# Altium PCB EDR.PcbDoc (part 2 of 2)
Units mm, origin at the board's own origin, x right, y up, seen from the top; angles counter-clockwise.
Board outline 99.5 x 72 mm, 2 copper layers (Top Layer, Bottom Layer); 162 components, 102 nets, 587 pads, 403 vias.
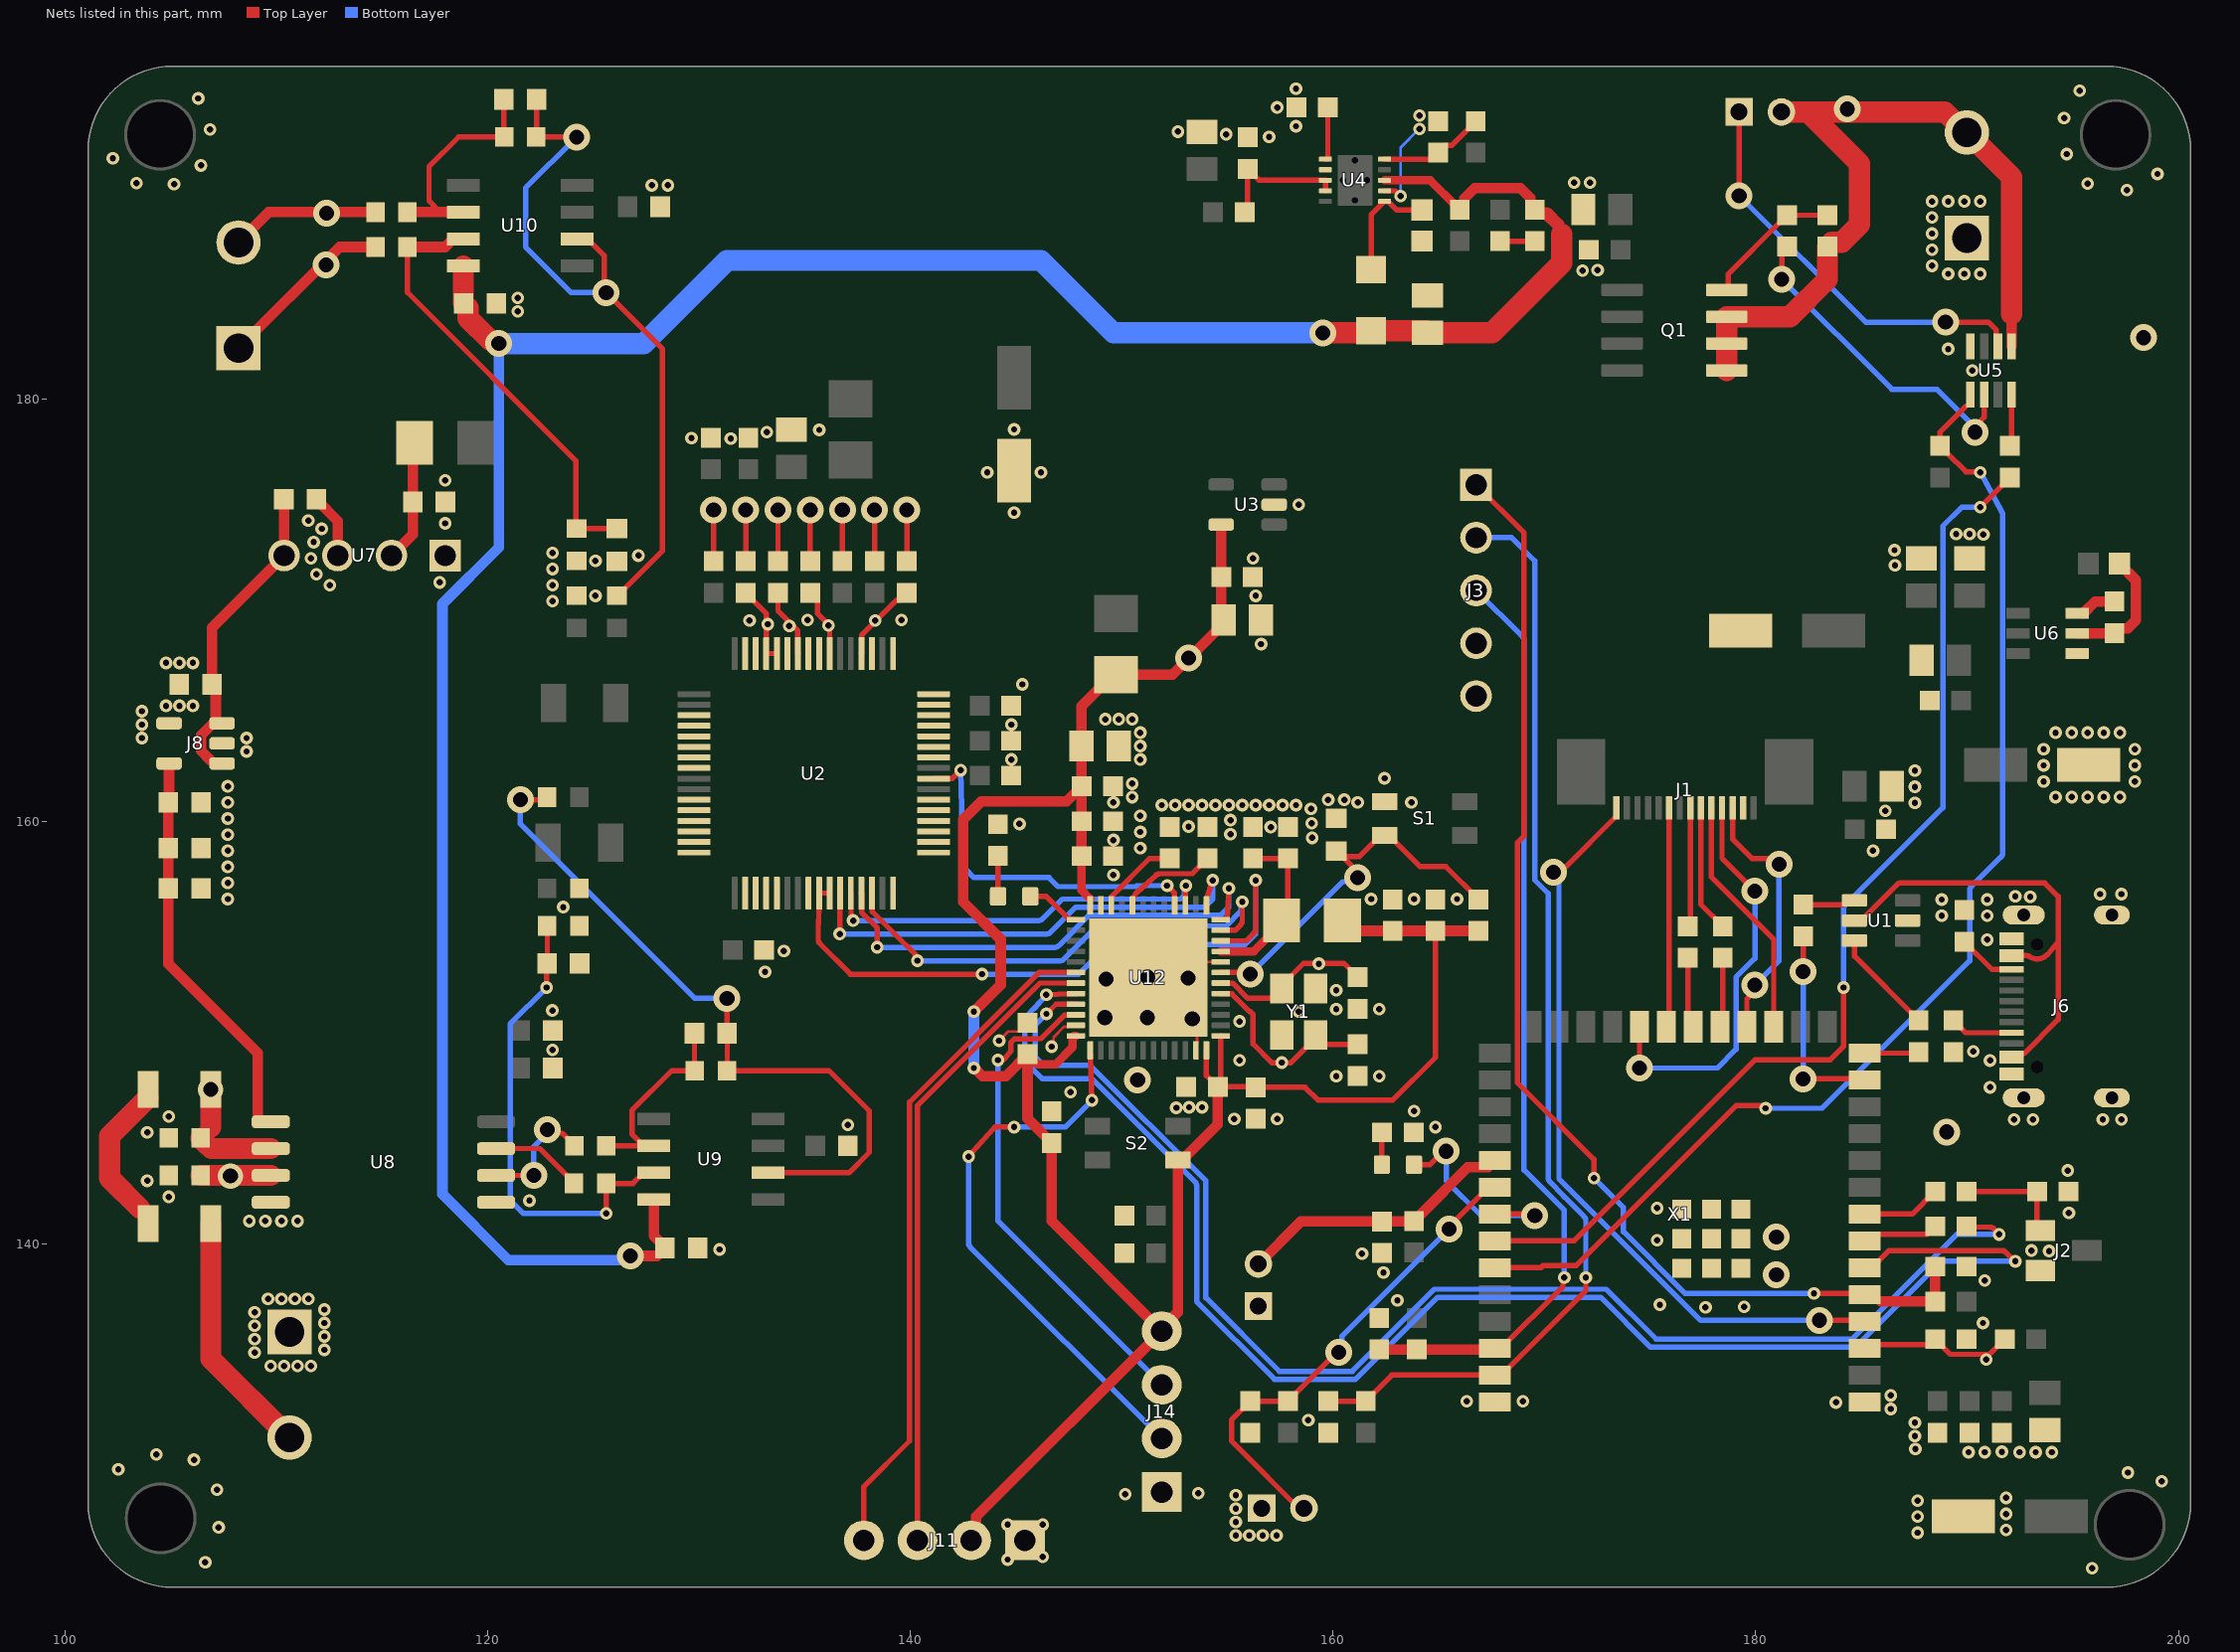
[diagram p2: the nets of this part, all layers, seen from the top]

## Via types
v1: diameter 0.6, hole 0.3, Top Layer to Bottom Layer, 331 vias
v2: diameter 1.27, hole 0.711, Top Layer to Bottom Layer, 70 vias
v3: diameter 1.2, hole 0.711, Top Layer to Bottom Layer, 2 vias

## Nets (pads, with @x,y where several pads share a name; then routed paths per layer and width w, separated by ;. In a path a pad name is that pad's centre, name@x,y a point inside that pad or via, vN(x,y) a via of type N, cw(c..) or ccw(c..) an arc to the next point about the centre after c; other vN are vias at no path point) (continued)
GND: C1.2 C2.1 C3.2 C4.2 C5.2 C6.1 C7.1 C8.1 C9.1 C10.2 C11.2 C12.2 C13.1 C14.1 C15.2 C16.2 C17.2 C18.2 C19.2 C20.1 C21.1 C22.1 C23.1 C24.1 C25.1 C26.1 C27.1 C28.2 C29.2 C30.2 C31.2 C32.2 C33.2 C34.1 C35.1 C36.1 C37.1 C38.2 C39.1 C40.1 C41.1 C42.1 C43.1 C44.1 C45.1 C46.1 C47.1 C48.1 C49.2 C50.2 C52.2 C53.1 C54.1 C55.2 C56.2 C57.1 C58.1 C60.2 C61.1 C62.1 C66.2 C70.2 C72.2 C73.2 C74.2 C75.2 C76.2 C79.1 C80.1 J1.2 J2.2 J3.4 J3.5 J4.1 J5.1 J6.A1_B12 J6.B1_A12 J6.S1 J6.S2 J6.S3 J6.S4 J11.1 J14.1 J15.1 L4.2 R6.1 R13.2 R14.1 R17.2 R18.2 R19.1 R38.1 R39.1 R40.1 R41.1 R44.1 S1.1 U1.2 U2.2 U2.3 U2.4 U2.5 U2.8 U2.16 U2.17 U2.18 U2.19 U2.20 U2.21 U2.22 U2.26 U2.27 U2.28 U2.29 U2.30 U2.31 U2.32 U2.33 U2.35 U2.40 U2.41 U2.43 U2.46 U2.47 U2.51 U2.52 U2.53 U2.54 U2.55 U2.56 U2.59 U2.60 U2.61 U2.62 U2.63 U2.64 U3.2 U4.2 U4.7 U5.4 U6.4 U7.1 U8.5 U12.8 U12.23 U12.35 U12.47 U12.49 X1.1 X1.40 X1.41 X1.42 X1.43 X1.44 X1.45 X1.46 X1.47 X1.48 X1.49 Y1.2 Y1.4 | length 33.5
  Top Layer w0.127: v1(144.196,149.631) 144.636,150.071 145.14,150.071 145.542,150.473 C15.2@145.542,150.478 ; v1(146.685,149.352) 146.776,149.443 146.776,149.802 147.262,150.289 147.455,150.289 147.526,150.36 U12.35@147.826,150.36 ; U12.47@153.506,149.18 153.566,149.551 153.566,149.874 v2(153.34,150.673) v2(151.232,152.629) v2(153.137,152.603) 153.992,153.36 U12.8@154.686,153.36
  Top Layer w0.254: R40.1@124.186,172.333 R40.1@124.206,172.353 ; C31.2@130.683,172.322 v2(130.683,174.752) ; C34.1@132.207,172.322 v2(132.207,174.752) ; C35.1@133.731,172.322 v2(133.731,174.752) ; C37.1@135.255,172.322 v2(135.255,174.752) ; C29.2@136.779,172.322 v2(136.779,174.752) ; C30.2@138.303,172.322 v2(138.303,174.752) ; C36.1@139.827,172.322 v2(139.827,174.752) ; U4.7@162.433,189.857 162.949,189.857 v1(163.195,189.611) ; U5.4@190.16,182.499 U5.4@190.16,182.905
  Bottom Layer w0.127: v1(163.195,189.611) 163.195,191.897 v1(164.084,192.786)
  other v1: 195.91,124.666 144.602,125.073 146.253,125.2 155.397,126.216 156.032,126.216 156.667,126.216 157.328,126.213 187.655,126.343 191.846,126.47 144.602,126.724 146.253,126.724 155.397,126.851 187.655,127.105 191.846,127.232 155.397,127.486 187.655,127.867 191.846,127.994 155.397,128.121 150.165,128.168 153.619,128.219 199.212,128.781 197.612,129.188 190.068,130.153 190.83,130.153 192.481,130.153 193.243,130.153 194.005,130.153 191.643,130.175 187.554,130.302 187.528,130.915 187.528,131.55 158.826,131.677 186.385,132.202 183.794,132.512 166.319,132.566 168.986,132.566 186.385,132.842 190.754,136.271 177.622,137.011 179.451,137.033 175.463,137.138 163.043,137.338 190.83,138.281 162.382,138.662 161.366,139.551 193.878,139.678 193.04,139.7 130.962,139.754 175.336,140.186 194.818,141.478 175.336,141.71 121.971,142.062 194.767,143.488 164.846,145.542 137.033,145.644 192.227,145.901 193.116,145.901 196.418,145.901 197.307,145.901 155.321,145.923 157.353,145.923 163.83,146.304 152.578,146.456 153.187,146.482 153.797,146.482 147.574,147.193 191.084,147.425 160.147,147.955 162.179,147.955 155.568,148.701 191.084,148.695 190.296,149.127 123.063,149.2 155.575,150.546 158.369,151.003 123.057,151.063 160.147,151.13 162.179,151.13 160.147,152.019 133.121,152.886 134.01,153.876 190.957,154.41 188.798,155.553 190.957,155.553 123.571,155.956 188.798,156.315 190.957,156.315 161.798,156.337 163.83,156.337 165.862,156.337 192.989,156.442 192.278,156.464 196.291,156.569 197.307,156.569 149.606,157.48 185.547,158.623 150.876,158.75 149.606,159.131 159.004,159.233 155.143,159.41 150.876,159.512 157.048,159.741 153.162,159.766 145.161,159.893 158.979,159.918 155.143,160.071 150.876,160.274 186.131,160.506 158.953,160.604 151.892,160.782 152.527,160.782 153.162,160.782 153.797,160.782 154.432,160.782 155.067,160.782 155.702,160.782 156.337,160.782 156.972,160.782 157.607,160.782 158.242,160.782 187.528,160.887 149.606,160.909 161.163,160.909 163.703,160.909 159.766,161.036 160.528,161.036 150.495,161.163 194.183,161.163 194.945,161.163 195.707,161.163 196.469,161.163 197.231,161.163 187.528,161.649 150.495,161.798 193.624,161.903 197.942,161.903 162.433,162.052 187.528,162.411 193.624,162.665 197.942,162.665 144.78,162.941 150.876,162.941 193.624,163.427 197.942,163.427 150.876,163.576 150.876,164.211 194.183,164.211 194.945,164.211 195.707,164.211 196.469,164.211 197.231,164.211 144.78,164.592 149.225,164.846 149.86,164.846 150.495,164.846 145.288,166.497 156.591,168.402 132.387,169.519 135.128,169.545 139.573,169.545 123.063,170.434 125.095,170.688 156.337,170.688 123.063,171.196 117.729,171.323 123.063,171.958 186.588,172.136 125.095,172.339 156.21,172.466 127.127,172.593 123.063,172.72 186.563,172.847 190.77,173.587 189.484,173.609 190.119,173.609 117.983,174.117 144.907,174.625 158.369,175.006 117.983,176.149 143.637,176.53 146.177,176.53 131.495,178.133 129.641,178.159 133.197,178.438 135.686,178.54 144.907,178.562 190.246,181.356 189.103,182.372 121.412,184.15 121.412,184.785 189.103,185.928 189.865,185.928 190.627,185.928 171.806,186.08 172.517,186.106 188.341,186.309 188.341,187.071 188.341,187.833 188.341,188.595 188.341,189.357 189.103,189.357 189.865,189.357 190.627,189.357 197.561,189.894 127.762,190.119 128.524,190.119 105.156,190.173 195.707,190.198 103.378,190.224 171.399,190.246 172.161,190.246 199.009,190.656 106.426,191.059 102.26,191.392 194.716,191.595 156.972,192.405 154.94,192.532 152.654,192.659 106.857,192.764 158.242,192.913 194.589,193.297 164.084,193.421 157.353,193.802 106.299,194.234 195.326,194.593 158.242,194.691
  other v2: 180.975,138.557 180.975,140.335 189.027,145.313 150.749,147.777 149.2,150.724 151.206,150.724 149.25,152.552 198.349,182.905
GPIO1: C11.1 J3.2 R8.1 X1.39 | length 53.1
  Top Layer w0.254: C11.1@159.766,132.571 R8.1@161.544,132.571 161.544,132.576 161.882,132.914 161.887,132.914 162.778,133.805 X1.39@167.653,133.805 167.953,133.805 171.958,137.81 v1(171.958,138.425)
  Bottom Layer w0.254: J3.2@166.768,173.442 168.442,173.442 169.545,172.339 169.545,157.239 170.18,156.604 170.18,143.141 ccw(c170.434,143.142) 170.249,142.968 170.915,142.268 ccw(c172.3,143.588) 170.942,142.24 171.883,141.299 cw(c171.704,141.119) 171.958,141.119 v1(171.958,138.425)
GPIO2: C12.1 J3.3 R9.1 X1.38 | length 44.6
  Top Layer w0.254: X1.38@167.596,135.018 167.896,135.018 170.876,137.998 170.876,138.359 v1(170.942,138.425)
  Top Layer w0.5: C12.1@162.179,135.018 R9.1@163.957,135.018 X1.38@167.596,135.018
  Bottom Layer w0.254: J3.3@166.768,170.942 168.963,168.747 cw(c168.783,168.568) 169.037,168.568 169.037,143.51 170.942,141.605 v1(170.942,138.425)
GPIO5: C10.1 J3.1 R7.1 X1.5 | length 56.3
  Top Layer w0.254: J3.1@166.768,175.942 169.037,173.673 169.037,159.321 168.714,158.998 168.714,147.643 172.339,144.018 v1(172.339,143.129) ; v1(182.753,137.668) 185.1,137.668 X1.5@185.153,137.615 185.476,137.292 185.92,137.292 185.925,137.287
  Top Layer w0.5: 185.925,137.287 R7.1@188.485,137.287 C10.1@188.485,138.938
  Bottom Layer w0.254: v1(172.339,143.129) 173.736,141.732 173.736,140.589 176.657,137.668 v1(182.753,137.668)
GPIO19: R15.1 X1.13 | length 9.7
  Top Layer w0.254: v2(182.245,147.828) 185.1,147.828 X1.13@185.153,147.775 ; v2(182.245,152.908) R15.1@182.245,154.576
  Bottom Layer w0.254: v2(182.245,147.828) v2(182.245,152.908)
GPIO20: R12.1 X1.14 | length 2.2
  Top Layer w0.254: X1.14@185.153,149.045 R12.1@187.395,149.045
GPIO38: C14.2 J5.2 R11.2 X1.31 | length 13.2
  Top Layer w0.254: R11.2@163.813,141.08 R11.2@163.83,141.097 163.83,141.102 164.168,141.44 R11.2@164.173,141.44 ; X1.31@167.33,143.642 X1.31@167.653,143.965
  Top Layer w0.5: J5.2@156.464,139.065 158.479,141.08 C14.2@162.306,141.08 R11.2@163.813,141.08 ; R11.2@164.173,141.44 166.375,143.642 X1.31@167.33,143.642
GPIO39: C13.2 J4.2 R10.2 X1.32 | length 23.2
  Top Layer w0.254: J4.2@158.623,127.508 158.369,127.508 155.52,130.357 155.513,130.357 155.364,130.506 155.364,130.513 155.194,130.683 155.194,131.677 156.083,132.566 C13.2@156.083,132.571 R10.2@157.861,132.571 157.861,132.576 158.199,132.914 158.204,132.914 160.164,134.874 v2(160.274,134.874) ; v2(165.481,140.716) 165.481,140.823 167.353,142.695 X1.32@167.653,142.695
  Bottom Layer w0.254: v2(160.274,134.874) 160.421,135.021 160.421,135.656 v2(165.481,140.716)
GPIO41: R24.2 X1.34 | length 51
  Top Layer w0.254: X1.34@167.653,140.155 171.397,140.155 179.959,148.717 183.514,148.717 184.149,149.352 v1(184.15,152.146) v1(184.15,152.146) ; v1(190.627,174.879) 190.627,174.891 192.024,176.288 R24.2@192.024,176.293
  Bottom Layer w0.254: v1(184.15,152.146) 184.15,155.956 188.849,160.655 188.849,173.99 189.738,174.879 v1(190.627,174.879)
GPIO42: R26.2 U5.5 X1.35 | length 58.1
  Top Layer w0.127: 189.945,179.667 190.02,179.667 190.16,179.807 U5.5@190.16,180.213
  Top Layer w0.254: X1.35@167.653,138.885 169.837,138.885 169.931,138.979 171.491,138.979 179.07,146.558 180.34,146.558 v1(180.467,146.431) ; 189.945,179.667 188.722,178.443 R26.2@188.722,177.783 188.722,177.778 189.06,177.44 189.065,177.44 189.946,176.559 190.598,176.559 v1(190.627,176.53)
  Bottom Layer w0.254: v1(180.467,146.431) 183.134,146.431 190.119,153.416 190.119,156.74 cw(c190.373,156.74) 190.193,156.919 191.602,158.328 ccw(c191.422,158.507) 191.676,158.507 191.676,174.54 ccw(c191.422,174.54) 191.645,174.662 v1(190.627,176.53)
ISO_GND: C63.1 C64.2 C65.1 C69.1 C71.1 J8.2 J8.4 J10.1 R32.1 R37.2 U7.3 U8.4 | length 3.1
  Top Layer w0.254: C64.2@111.9,175.23 C64.2@111.9,175.26
  Top Layer w0.5: C64.2@111.9,175.23 112.903,174.227 U7.3@112.903,172.593
  other v1: 106.629,124.946 107.264,126.597 107.188,128.375 102.514,129.34 106.095,129.797 104.317,130.051 109.728,134.239 110.363,134.239 110.998,134.239 111.633,134.239 108.966,134.874 112.268,135.001 108.966,135.509 112.268,135.636 108.966,136.144 112.268,136.271 108.966,136.779 112.268,136.906 109.601,137.414 110.236,137.414 110.871,137.414 111.506,137.414 108.712,141.097 109.474,141.097 110.236,141.097 110.998,141.097 104.902,142.24 103.886,143.002 103.886,145.288 104.902,146.05 107.696,156.337 107.696,157.099 107.696,157.861 107.696,158.623 107.696,159.385 107.696,160.147 107.696,160.909 107.696,161.671 108.585,163.322 103.632,163.957 108.585,163.957 103.632,164.592 103.632,165.227 104.775,165.481 105.41,165.481 106.045,165.481 104.775,167.513 105.41,167.513 106.045,167.513 112.522,171.196 111.887,171.704 111.633,172.466 111.76,173.228 112.141,173.863 111.506,174.244
LCD-CS: J1.3 X1.18 | length 12.5
  Top Layer w0.254: J1.3@178.903,160.655 178.903,159.171 179.812,158.262 180.553,158.262 180.827,157.988 v2(181.102,157.988) ; X1.18@179.578,150.295 179.578,151.617 179.959,151.998 v2(179.959,152.273)
  Bottom Layer w0.254: v2(179.959,152.273) 181.102,153.416 v2(181.102,157.988)
LCD-RS: J1.5 X1.17 | length 11.6
  Top Layer w0.254: J1.5@177.903,160.655 177.903,157.377 180.848,154.432 X1.17@180.848,150.295
LCD-RST: J1.4 X1.22 | length 19.3
  Top Layer w0.254: v2(174.498,148.336) X1.22@174.498,150.295 ; J1.4@178.403,160.655 178.403,158.274 v2(179.959,156.718)
  Bottom Layer w0.254: v2(174.498,148.336) 178.181,148.336 179.07,149.225 179.07,152.641 179.959,153.53 v2(179.959,156.718)
MISD: J1.9 X1.21 | length 10.4
  Top Layer w0.254: X1.21@175.768,150.295 175.903,150.43 J1.9@175.903,160.655
MOSI: J1.6 R3.1 | length 6
  Top Layer w0.254: J1.6@177.403,160.655 177.403,156.087 178.435,155.055 R3.1@178.435,155.05
NetC4_1: C4.1 R1.1 X1.3 | length 7.4
  Top Layer w0.254: X1.3@185.153,135.075 185.333,135.255 186.969,135.255 188.231,135.255 C4.1@188.485,135.509 188.49,135.509 189.209,134.79 191.063,134.79 191.782,135.509 R1.1@191.787,135.509
  other v1: 190.906,134.544
NetC19_1: C19.1 U12.22 | length 3.9
  Top Layer w0.254: U12.22@149.506,156.04 149.514,156.048 149.514,156.457 151.316,158.259 C19.1@152.273,158.259
NetC20_2: C20.2 C21.2 E2.1 U12.9 | length 8.3
  Top Layer w0.254: C20.2@156.21,158.259 C21.2@157.861,158.259 157.861,155.623 E2.1@157.559,155.321 E2.1@157.559,155.171
  Top Layer w0.4: U12.9@154.686,153.86 156.248,153.86 E2.1@157.559,155.171
NetC24_2: C24.2 R16.1 S1.3 U12.7 | length 17.8
  Top Layer w0.254: U12.7@154.686,152.86 155.623,152.86 v2@155.702,152.781 ; C24.2@160.147,158.61 160.177,158.61 C24.2@160.431,158.356 ; v2(161.163,157.353) 161.163,157.624 C24.2@160.431,158.356 ; R16.1@166.878,156.32 166.878,156.325 165.334,157.868 164.117,157.868 162.638,159.347 S1.3@162.438,159.347 162.238,159.347 161.247,158.356 C24.2@160.431,158.356
  Bottom Layer w0.254: v2(156.083,152.781) 160.461,157.159 160.969,157.159 v2(161.163,157.353)
NetC25_2: C25.2 U12.5 Y1.1 | length 9.4
  Top Layer w0.254: U12.5@154.686,151.86 154.694,151.852 155.216,151.852 156.065,151.003 156.083,151.003 156.21,150.876 156.21,149.479 157.099,148.59 158.006,148.59 159.169,149.753 159.169,149.885 159.592,149.462 C25.2@161.163,149.462
  other v1: 157.574,148.599
NetC27_2: C27.2 U12.6 Y1.3 | length 7.8
  Top Layer w0.254: U12.6@154.686,152.36 154.694,152.352 155.255,152.352 155.969,151.638 157.146,151.638 157.569,152.061 Y1.3@157.569,152.103 157.569,152.253 158.605,153.289 160.516,153.289 161.163,152.642 C27.2@161.163,152.637
  other v1: 159.327,153.273
NetC34_2: C34.2 U2.44 U2.45 | length 3.8
  Top Layer w0.254: C34.2@132.207,170.832 132.207,170.827 133.177,169.857 U2.45@133.177,167.956 U2.44@133.677,167.956
  other v1: 133.251,169.342
NetC35_2: C35.2 U2.42 | length 3.3
  Top Layer w0.254: C35.2@133.731,170.832 133.731,169.981 134.664,169.048 134.664,167.969 U2.42@134.677,167.956
  other v1: 134.267,169.265
NetC36_2: C36.2 U2.36 | length 3.8
  Top Layer w0.254: U2.36@137.677,167.956 137.69,167.969 137.69,168.821 139.358,170.489 139.489,170.489 C36.2@139.827,170.827
  other v1: 138.331,169.519
NetC37_2: C37.2 U2.39 | length 3.3
  Top Layer w0.254: C37.2@135.255,170.832 135.593,170.494 135.593,169.863 136.177,169.279 U2.39@136.177,167.956
  other v1: 136.121,169.291
NetC51_2: C51.2 R21.1 | length 1.8
  Top Layer w0.254: C51.2@167.767,187.469 R21.1@169.545,187.469
NetC52_1: C52.1 U4.1 | length 2.6
  Top Layer w0.254: U4.1@159.633,191.357 159.742,191.357 159.749,191.364 C52.1@159.749,193.802
NetC53_2: C53.2 R22.1 U4.10 | length 5.1
  Top Layer w0.254: U4.10@162.433,191.357 164.67,191.357 C53.2@164.973,191.66 164.973,191.665 165.311,192.003 165.609,192.003 166.751,193.145 R22.1@166.751,193.15
NetC59_2: C59.2 U6.6 | length 2
  Top Layer w0.254: U6.6@195.205,169.86 U6.6@195.504,169.86
  Top Layer w0.5: U6.6@195.504,169.86 196.061,170.417 C59.2@196.977,170.417
NetC66_1: C66.1 E1.2 U7.2 | length 5.8
  Top Layer w0.254: E1.2@116.446,177.835 E1.2@116.538,177.927
  Top Layer w0.5: U7.2@115.443,172.593 116.446,173.596 C66.1@116.446,175.133 E1.2@116.446,177.835
NetC67_1: C67.1 R28.1 R31.2 U10.2 | length 10.5
  Top Layer w0.254: 117.747,188.849 117.221,189.375 117.221,191.008 118.618,192.405 R28.1@120.784,192.405 120.764,192.425 C67.1@120.764,194.183
  Top Layer w0.5: 116.655,188.849 117.747,188.849 U10.2@118.839,188.849
NetC67_2: C67.2 R28.2 R36.1 U10.6 | length 42.2
  Top Layer w0.254: C67.2@122.314,194.183 122.314,192.425 R28.2@122.294,192.405 v2(124.206,192.405) ; U10.6@124.239,187.579 124.714,187.579 125.514,186.779 v2@125.514,185.128 ; R36.1@126.111,170.688 126.141,170.688 128.27,172.817 128.27,182.372 ; v2@125.514,185.128 128.27,182.372 ; v2@125.514,185.128 128.27,182.372 ; v2@125.514,185.128 128.27,182.372
  Bottom Layer w0.254: v2(124.206,192.405) 121.793,189.992 121.793,187.198 123.952,185.039 v2(125.603,185.039)
NetC68_1: C68.1 R29.1 R30.2 U9.2 | length 9.7
  Top Layer w0.254: R30.2@125.603,144.653 U9.2@127.381,144.653 ; U9.2@127.856,144.653 U9.2@127.381,144.653 ; C68.1@129.781,149.987 129.781,148.229 R29.1@129.801,148.209 128.708,148.209 126.827,146.328 126.827,145.207 U9.2@127.381,144.653
NetC68_2: C68.2 R29.2 R33.1 U9.6 | length 33.8
  Top Layer w0.254: v2(121.539,161.036) 122.689,161.036 R33.1@122.816,161.163 ; v2(131.318,151.638) 131.318,150 C68.2@131.331,149.987 131.331,148.229 R29.2@131.311,148.209 136.144,148.209 138.049,146.304 138.049,144.347 137.085,143.383 U9.6@133.256,143.383
  Bottom Layer w0.254: v2(121.539,161.036) 121.539,159.893 129.794,151.638 v2(131.318,151.638)
NetC79_2: C79.2 R34.2 R39.2 U9.3 | length 22.4
  Top Layer w0.127: C79.2@122.783,153.276 C79.2@122.796,153.289 ; R34.2@125.596,142.875 R34.2@125.603,142.868
  Top Layer w0.24: v1(122.783,152.149) C79.2@122.783,153.276
  Top Layer w0.254: C79.2@122.796,153.289 122.816,153.309 R39.2@122.816,155.067 ; R34.2@125.596,142.875 126.873,142.875 127.381,143.383 U9.3@127.856,143.383 ; v1(125.603,141.456) R34.2@125.603,142.868
  Bottom Layer w0.254: v1(122.783,152.149) 121.056,150.422 121.056,142.083 121.683,141.456 v1(125.603,141.456)
NetC80_2: C80.2 R35.2 R40.2 U10.3 | length 25.3
  Top Layer w0.254: R35.2@116.198,187.198 116.198,185.046 124.163,177.081 R40.2@124.163,173.876 ; U10.3@118.364,187.579 U10.3@118.839,187.579 ; R40.2@124.163,173.876 C80.2@126.111,173.876 ; R40.2@124.163,173.876 C80.2@126.111,173.876 ; R40.2@124.163,173.876 C80.2@126.111,173.876
  Top Layer w0.5: R35.2@116.198,187.198 117.983,187.198 U10.3@118.364,187.579
NetD1_C: D1.C L4.1 U4.6 | length 5.4
  Top Layer w0.254: D1.C@161.798,186.131 161.798,188.722 U4.6@162.433,189.357 162.599,189.357 163.007,188.949 L4.1@164.211,188.949
NetD2_NEG: D2.NEG R44.2 | length 1.5
  Top Layer w0.254: D2.NEG@162.306,143.764 162.306,145.271 R44.2@162.323,145.288
NetD2_POS: D2.POS X1.33 | length 11.5
  Top Layer w0.254: D2.POS@163.83,143.764 164.592,143.764 ; X1.33@167.653,141.425 169.09,141.425 v2@169.164,141.351 ; 164.592,143.764 v2@165.29,144.463 ; 164.592,143.764 v2@165.29,144.463 ; 164.592,143.764 v2@165.29,144.463
  Bottom Layer w0.254: v2(165.354,144.399) 165.354,143.002 167.005,141.351 v2(169.545,141.351)
NetD_NEG: D.NEG R18.1 | length 1.9
  Top Layer w0.254: D.NEG@144.145,156.464 R18.1@144.145,158.386
NetD_POS: D.POS U12.25 | length 2.6
  Top Layer w0.254: D.POS@145.669,156.464 146.431,156.464 147.518,155.377 147.518,155.368 147.526,155.36 U12.25@147.826,155.36
NetJ2_1: J2.1 R5.1 R6.2 | length 5.2
  Top Layer w0.254: R5.1@189.975,142.494 R6.2@193.311,142.494 193.311,140.803 J2.1@193.464,140.65
NetJ6_A5: J6.A5 R13.1 | length 3
  Top Layer w0.254: R13.1@189.357,150.588 189.357,150.583 189.695,150.245 189.7,150.245 189.938,150.007 J6.A5@192.1,150.007
NetJ6_B5: J6.B5 R14.2 | length 2.8
  Top Layer w0.254: R14.2@189.865,154.322 189.865,154.317 191.175,153.007 J6.B5@192.1,153.007
NetJ9_1: J9.1 R35.1 | length 9
  Top Layer w0.254: R35.1@114.35,186.86 114.38,186.86 114.688,187.168 R35.1@114.688,187.198
  Top Layer w0.5: J9.1@108.204,182.412 112.99,187.198 R35.1@114.688,187.198
  other v2: 112.344,186.36
NetJ9_2: J9.2 R31.1 | length 7.6
  Top Layer w0.254: J9.2@108.204,187.412 J9.2@108.555,187.061 ; R31.1@114.688,188.849 R31.1@114.688,188.879
  Top Layer w0.5: J9.2@108.204,187.412 109.641,188.849 R31.1@114.688,188.849
  other v2: 112.37,188.798
NetJ10_2: J10.2 R43.1 | length 11.7
  Top Layer w1: R43.1@106.89,140.97 106.89,134.577 J10.2@110.617,130.85
NetJ11_3: J11.3 U12.31 | length 30.5
  Top Layer w0.254: J11.3@140.335,125.984 140.335,146.565 146.13,152.36 U12.31@147.826,152.36
NetJ11_4: J11.4 U12.30 | length 32
  Top Layer w0.254: J11.4@137.795,125.984 137.795,128.524 139.954,130.683 139.954,146.723 146.091,152.86 U12.30@147.826,152.86
NetJ16_1: J16.1 U5.2 | length 19.6
  Top Layer w0.254: v2@179.197,189.611 v2(179.213,189.627) J16.1@179.213,193.59 ; v2(188.976,183.642) 191.008,183.642 191.384,183.266 191.384,182.575 U5.2@191.46,182.499
  Bottom Layer w0.254: v2(179.213,189.627) 185.198,183.642 v2(188.976,183.642)
NetQ1_4: Q1.4 R25.2 R27.1 | length 6.6
  Top Layer w0.254: Q1.4@178.624,185.166 178.689,185.231 178.689,185.911 181.14,188.362 181.145,188.362 181.483,188.7 R25.2@181.483,188.705 R27.1@183.388,188.705
NetR2_2: R2.2 X1.7 | length 3.6
  Top Layer w0.254: X1.7@185.153,140.155 185.46,140.462 188.099,140.462 188.48,140.843 R2.2@188.485,140.843
NetR3_2: R3.2 X1.19 | length 3.3
  Top Layer w0.254: X1.19@178.308,150.295 178.435,150.422 R3.2@178.435,153.56
NetR4_2: R4.2 X1.20 | length 3.4
  Top Layer w0.254: R4.2@176.784,153.56 176.784,150.549 X1.20@177.038,150.295
NetR5_2: R5.2 X1.8 | length 3.8
  Top Layer w0.254: X1.8@185.153,141.425 187.411,141.425 188.48,142.494 R5.2@188.485,142.494
NetR12_2: R12.2 U1.6 | length 5
  Top Layer w0.254: U1.6@184.673,154.371 184.673,153.626 187.706,150.593 R12.2@187.706,150.588
NetR15_2: R15.2 U1.4 | length 2.5
  Top Layer w0.254: R15.2@182.245,156.066 184.158,156.066 184.363,156.271 U1.4@184.673,156.271
NetR17_1: R17.1 U12.20 | length 4.6
  Top Layer w0.254: U12.20@150.506,156.04 150.514,156.348 150.658,156.589 cw(c150.905,156.441) 150.714,156.656 151.629,157.471 cw(c151.798,157.281) 151.798,157.535 153.332,157.535 154.051,158.254 R17.1@154.051,158.259
NetR24_1: R24.1 U5.8 | length 2.5
  Top Layer w0.254: R24.1@192.024,177.783 192.11,177.869 U5.8@192.11,180.213
NetR25_1: R25.1 U5.6 | length 15.9
  Top Layer w0.254: v2(181.229,185.674) 181.229,186.961 R25.1@181.483,187.215 ; v2(190.373,178.435) 190.373,178.71 190.81,179.147 U5.6@190.81,180.213
  Bottom Layer w0.254: v2(181.229,185.674) 186.436,180.467 188.573,180.467 190.373,178.667 v2(190.373,178.435)
NetR30_1: R30.1 U8.6 | length 5.6
  Top Layer w0.254: U8.6@120.392,143.256 v2@121.92,143.256 ; v2(122.809,145.415) 122.97,145.254 123.522,145.254 124.093,144.683 R30.1@124.093,144.653
  Bottom Layer w0.254: v2(122.174,143.256) 122.174,144.613 122.809,145.248 v2(122.809,145.415)
NetR32_2: R32.2 U8.3 | length 3.3
  Top Layer w1: R32.2@106.419,143.256 U8.3@109.732,143.256
  other v3: 107.823,143.231
NetR34_1: R34.1 U8.7 | length 4.4
  Top Layer w0.254: U8.7@120.392,144.526 122.465,144.526 124.086,142.905 R34.1@124.086,142.875
NetR37_1: R37.1 R42.2 U8.2 | length 6
  Top Layer w0.254: R37.1@106.419,145.004 R37.1@106.419,145.034 106.419,145.064 106.89,145.535 ; R37.1@106.727,144.696 106.757,144.696 106.927,144.526
  Top Layer w1: R37.1@106.419,145.004 R37.1@106.727,144.696 ; 106.89,145.535 v3(106.89,147.32) ; 106.927,144.526 U8.2@109.732,144.526
NetR42_1: R42.1 R43.2 | length 7.9
  Top Layer w0.254: R43.2@103.529,141.708 103.572,141.708 103.93,141.35 R43.2@103.93,140.97 ; R42.1@103.93,146.94 R42.1@103.93,147.32
  Top Layer w1: R43.2@103.529,141.708 102.108,143.129 102.108,145.118 R42.1@103.93,146.94
PA9: U12.32 X1.6 | length 73.9
  Top Layer w0.254: v1(146.431,151.806) 147.518,151.852 U12.32@147.826,151.86 ; X1.6@185.776,139.162 X1.6@185.153,138.885 185.476,139.208 185.817,139.208 186.309,139.7 191.643,139.7 cw(c191.643,139.446) 191.819,139.63 v1(192.278,139.192)
  Bottom Layer w0.254: v1(146.431,151.806) 145.879,151.187 cw(c145.689,151.355) 145.868,151.175 145.489,150.796 ccw(c145.669,150.617) 145.415,150.617 145.415,148.666 146.253,147.828 148.59,147.828 153.469,142.949 cw(c153.289,142.77) 153.543,142.77 153.543,137.287 157.226,133.604 161.061,133.604 164.948,137.49 172.658,137.49 175.02,135.128 184.712,135.128 188.776,139.192 v1(192.278,139.192)
PA10: R2.1 U12.33 | length 65.5
  Top Layer w0.254: v1(146.434,150.9) 146.894,151.36 U12.33@147.826,151.36 U12.33@147.518,151.352 ; R2.1@189.975,140.843 190.318,140.831 191.097,140.803 cw(c191.088,140.549) 191.274,140.722 v1(191.516,140.462)
  Bottom Layer w0.254: v1(146.434,150.9) 145.911,150.378 145.911,148.856 146.304,148.463 148.514,148.463 153.975,143.002 153.975,137.465 157.455,133.985 160.904,133.985 164.79,137.871 172.923,137.871 175.285,135.509 184.554,135.509 189.507,140.462 v1(191.516,140.462)
SCK: J1.7 R4.1 | length 5.7
  Top Layer w0.254: R4.1@176.784,155.05 176.903,155.169 J1.7@176.903,160.655
SD-CS: J1.14 X1.4 | length 36.3
  Top Layer w0.254: v2(170.434,157.607) 170.628,157.801 170.949,157.801 173.403,160.255 J1.14@173.403,160.655 ; v2(183.007,136.398) 185.1,136.398 X1.4@185.153,136.345
  Bottom Layer w0.254: v2(170.434,157.607) 170.614,157.427 cw(c170.434,157.248) 170.688,157.248 170.688,148.197 170.688,143.098 177.388,136.398 v2(183.007,136.398)
"STEM32 3.3V": C15.1 C16.1 C17.1 C18.1 C22.2 C23.2 C28.1 C42.2 C43.2 C44.2 C45.2 C46.2 E2.2 E3.2 J11.2 J14.4 R16.2 S2.1 U3.5 U12.1 U12.24 U12.36 U12.48 | length 118.9
  Top Layer w0.127: C15.1@145.542,148.983 C15.1@145.542,148.988
  Top Layer w0.254: J11.2@142.875,125.984 J11.2@143.11,126.219 ; C28.1@146.685,144.797 C28.1@146.685,144.802 ; C45.2@148.091,161.679 C45.2@148.099,161.671 ; U12.24@148.506,156.04 U12.24@148.506,156.34 ; E3.2@149.583,166.957 E3.2@149.733,166.957 ; J14.4@151.892,135.89 J14.4@151.892,136.033 ; S2.1@152.649,143.98 S2.1@152.849,143.98 ; U12.48@154.006,149.18 154.006,147.978 154.537,147.447 154.686,147.596 U12.1@154.686,149.86 ; C17.1@154.542,147.447 156.32,147.447 C18.1@156.337,147.43 158.674,147.43 159.291,146.812 162.814,146.812 164.846,148.844 C22.2@164.846,154.83 ; C43.2@154.701,171.579 C43.2@154.703,171.577 ; E2.2@160.449,155.321 E2.2@160.94,154.83
  Top Layer w0.4: C15.1@145.542,148.983 146.02,148.505 146.854,148.505 147.672,149.323 147.672,149.795 147.737,149.86 U12.36@147.826,149.86 ; C16.1@148.099,158.369 148.099,156.747 U12.24@148.506,156.34
  Top Layer w0.5: v1(143.002,148.336) 143.029,148.336 143.41,147.955 144.514,147.955 145.542,148.983 145.542,145.945 C28.1@146.685,144.802 ; v1(143.002,151.003) 144.272,152.273 144.272,154.432 142.494,156.21 142.494,160.099 143.352,160.958 147.386,160.958 147.879,161.451 147.879,161.456 148.094,161.671 C45.2@148.099,161.671 C46.2@148.099,160.02 C16.1@148.099,158.369 ; J11.2@143.11,126.219 143.11,127.108 J14.4@151.892,135.89 146.685,141.097 C28.1@146.685,144.797 ; C45.2@148.091,161.679 C44.2@148.091,163.576 148.091,165.465 E3.2@149.583,166.957 ; E3.2@149.733,166.957 152.394,166.957 154.703,169.266 C43.2@154.703,171.577 ; J14.4@151.892,136.033 152.649,136.79 S2.1@152.649,143.98 ; S2.1@152.849,143.98 154.537,145.668 C17.1@154.537,147.447 ; C43.2@154.701,171.579 U3.5@154.701,174.056 ; E2.2@160.94,154.83 C23.2@162.814,154.83 C22.2@164.846,154.83 R16.2@166.878,154.83
  Bottom Layer w0.5: v1(143.002,148.336) v1(143.002,151.003)
  other v2: 153.162,167.742
STEM32_A0: U2.9 U2.10 U12.10 | length 31.6
  Top Layer w0.254: U2.10@136.177,156.616 U2.9@135.677,156.616 135.664,155.958 135.636,154.849 ccw(c135.89,154.843) 135.636,154.844 135.636,154.41 ccw(c135.89,154.41) 135.71,154.231 137.16,152.781 v1(143.383,152.781) ; U12.10@154.686,154.36 155.884,154.36 156.263,154.739 ccw(c156.083,154.918) 156.337,154.918 v1(156.337,157.226)
  Bottom Layer w0.254: v1@143.51,152.781 147.955,152.781 149.352,154.178 155.829,154.178 156.337,154.686 v1(156.337,157.226)
STEM32_A1: U2.14 U12.11 | length 23
  Top Layer w0.254: U2.14@138.177,156.616 138.19,156.603 138.19,155.74 139.229,154.701 ; 139.23,154.7 140.261,153.669 cw(c140.081,153.49) 140.335,153.49 v1(140.335,153.416) ; U12.11@154.686,154.86 155.368,154.86 155.628,155.12 ccw(c155.448,155.299) 155.702,155.299 v1(155.702,156.21)
  Bottom Layer w0.254: v1(140.335,153.416) 147.088,153.416 ccw(c147.088,153.67) 147.267,153.49 148.844,155.067 154.94,155.067 155.636,155.763 155.636,156.144 v1(155.702,156.21)
STEM32_A2: U2.13 U12.12 | length 23
  Top Layer w0.254: U2.13@137.677,156.616 137.69,156.603 137.69,155.701 138.43,154.961 v1(138.43,154.051) ; U12.12@154.686,155.36 154.994,155.368 v1(155.067,156.845)
  Bottom Layer w0.254: v1(138.43,154.051) 146.834,154.051 ccw(c146.834,154.305) 147.013,154.125 148.463,155.575 154.686,155.575 155.067,155.956 v1(155.067,156.845)
STEM32_A3: U2.11 U12.13 | length 22.4
  Top Layer w0.254: v1(136.652,154.686) 136.652,155.11 cw(c136.906,155.109) 136.652,155.113 136.665,155.958 U2.11@136.677,156.616 ; U12.13@154.006,156.04 154.014,156.348 v1(154.305,157.226)
  Bottom Layer w0.254: v1(136.652,154.686) 146.453,154.686 ccw(c146.453,154.94) 146.632,154.76 147.828,155.956 153.924,155.956 154.305,156.337 v1(154.305,157.226)
STEM32_A5: U2.12 U12.15 | length 18.9
  Top Layer w0.254: U2.12@137.177,156.616 137.19,156.603 137.19,155.512 137.287,155.415 v1(137.287,155.321) ; U12.15@153.006,156.04 153.006,156.816 153.035,156.845 v1(153.035,156.972)
  Bottom Layer w0.254: v1(137.287,155.321) 146.072,155.321 ccw(c146.072,155.575) 146.251,155.395 147.193,156.337 152.781,156.337 152.969,156.525 152.969,156.906 v1(153.035,156.972)
STEM32_A6: U2.24 U12.16 | length 17
  Top Layer w0.254: U2.24@141.097,162.036 141.11,162.049 141.983,162.049 v1@142.24,162.306 ; v1(152.146,156.972) 152.498,156.62 152.498,156.048 U12.16@152.506,156.04
  Bottom Layer w0.254: v1(142.376,162.433) 142.495,157.959 ccw(c142.749,157.965) 142.568,157.787 ; 142.568,157.787 143.002,157.353 146.558,157.353 146.985,156.926 150.658,156.926 150.704,156.972 v1(152.146,156.972)
SW: C59.1 L5.2 U6.5 | length 9.6
  Top Layer w0.254: L5.2@197.204,172.202 L5.2@197.204,172.212
  Top Layer w0.5: C59.1@196.977,168.927 196.977,168.932 197.192,169.147 197.595,169.147 197.993,169.545 197.993,171.413 L5.2@197.204,172.202 ; U6.5@195.205,168.91 C59.1@196.977,168.91 ; U6.5@195.205,168.91 C59.1@196.977,168.91 ; U6.5@195.205,168.91 C59.1@196.977,168.91
SWCLK: J14.2 U12.37 | length 26.5
  Top Layer w0.254: v1(142.748,144.145) 143.92,145.457 143.93,145.468 144.005,145.542 v1(144.907,145.542) ; U12.37@148.506,149.18 148.514,148.872 v1(148.59,146.812)
  Bottom Layer w0.254: v1(142.748,144.145) 142.749,140.058 ccw(c143.003,140.058) 142.822,139.88 J14.2@151.892,130.81 ; v1(144.907,145.542) 147.32,145.542 v1(148.59,146.812)
SWDIO: J14.3 U12.34 | length 23.4
  Top Layer w0.254: v1(144.145,148.717) 144.414,148.744 144.487,148.817 144.697,149.075 144.755,149.145 144.755,149.563 144.903,149.712 145.749,149.712 146.175,149.731 147.296,150.852 147.518,150.852 U12.34@147.826,150.86
  Bottom Layer w0.254: v1(144.145,148.717) 144.145,141.097 J14.3@151.892,133.35
V0_EN: C63.2 C64.1 J8.1 J8.3 U7.4 | length 19.5
  Top Layer w0.254: J8.1@106.868,162.908 107.272,162.908 J8.1@107.427,162.753 ; C63.2@106.947,166.497 C63.2@107.128,166.316 ; C64.1@110.35,175.26 C64.1@110.363,175.247
  Top Layer w0.5: J8.1@106.868,162.908 106.426,163.351 106.426,164.084 J8.3@106.995,164.653 ; C63.2@106.947,166.497 106.947,169.177 U7.4@110.363,172.593 C64.1@110.363,175.247 ; J8.3@106.995,164.653 J8.3@107.427,164.653 ; J8.3@106.995,164.653 J8.3@107.427,164.653 ; J8.3@106.995,164.653 J8.3@107.427,164.653 ; J8.3@107.128,164.653 C63.2@107.128,166.316 ; J8.3@107.128,164.653 C63.2@107.128,166.316 ; J8.3@107.128,164.653 C63.2@107.128,166.316
VBUS: J6.A4_B9 J6.B4_A9 U1.5 | length 22
  Top Layer w0.254: U1.5@184.673,155.321 184.983,155.321 186.687,157.025 cw(c186.866,156.845) 186.866,157.099 193.675,157.099 194.31,156.464 194.31,154.33 ; J6.A4_B9@192.1,148.857 192.273,149.03 192.702,149.03 194.31,150.638 194.31,154.33 ; J6.B4_A9@192.1,153.657 192.805,153.657 cw(c192.804,153.403) 192.944,153.615 ccw(c193.319,154.178) 193.855,153.764 cw(c194.056,153.609) 193.858,153.768 194.309,154.329
VCC: J15.2 J16.2 Q1.1 Q1.2 Q1.3 R27.2 U5.1 | length 38.1
  Top Layer w0.254: R27.2@183.388,187.215 R27.2@183.595,187.422 ; J15.2@189.91,192.619 J15.2@189.992,192.619
  Top Layer w0.5: U5.1@192.11,182.499 192.11,184.023
  Top Layer w1: Q1.1@178.624,181.356 Q1.2@178.624,182.626 Q1.3@178.624,183.896 181.61,183.896 183.388,185.674 R27.2@183.388,187.215 ; J16.2@181.213,193.59 182.457,193.59 ; R27.2@183.595,187.422 184.07,187.422 184.912,188.264 184.912,191.135 182.457,193.59 ; J15.2@189.91,192.619 188.939,193.59 182.457,193.59 ; J15.2@189.992,192.619 192.11,190.501 192.11,184.023
  other v2: 184.328,193.726
VDD1_5: C65.2 C69.2 C71.2 J8.5 U8.1 | length 19.2
  Top Layer w0.254: C65.2@104.889,160.909 C65.2@104.917,160.937 ; U8.1@109.109,145.967 109.28,145.796 U8.1@109.732,145.796
  Top Layer w0.5: C65.2@104.889,160.909 C71.2@104.889,158.75 C69.2@104.889,156.845 104.889,153.267 109.109,149.047 U8.1@109.109,145.967 ; C65.2@104.917,160.937 J8.5@104.917,162.753
VIN: C49.1 R20.2 U4.3 U4.4 | length 6.5
  Top Layer w0.254: R20.2@155.812,188.849 155.956,188.993 C49.1@155.956,190.893 ; C49.1@155.956,190.898 C49.1@155.956,190.893 ; U4.4@159.633,189.857 U4.3@159.633,190.357 156.497,190.357 156.299,190.555 156.294,190.555 C49.1@155.956,190.893
VOUT: C54.2 C75.1 C76.1 D1.A R21.2 R23.2 U4.8 U9.4 U10.4 | length 127
  Top Layer w0.254: C76.1@118.839,184.551 C76.1@118.859,184.531 ; C75.1@128.003,139.446 128.021,139.464 128.051,139.464 128.384,139.797 C75.1@128.384,139.827 C75.1@128.384,139.857 ; D1.A@161.696,183.134 D1.A@161.798,183.236 ; C54.2@164.372,183.236 C54.2@164.465,183.143 ; R23.2@165.989,188.959 R23.2@165.989,188.964
  Top Layer w0.4: U4.8@162.433,190.357 164.596,190.357 165.831,189.122 R23.2@165.989,188.964
  Top Layer w0.5: C76.1@118.859,184.531 C76.1@119.069,184.321 ; v2@120.122,182.773 120.376,182.773 v2(120.523,182.626) ; v2(126.746,139.446) C75.1@128.003,139.446 ; U9.4@127.856,142.113 127.856,140.385 C75.1@128.384,139.857 ; R23.2@165.989,188.959 166.204,189.174 166.204,189.496 166.7,189.992 168.859,189.992 169.33,189.521 169.33,189.174 R21.2@169.545,188.959
  Top Layer w0.6: R21.2@169.545,188.959 169.545,188.954 169.71,188.789 170.113,188.789 170.638,188.264
  Top Layer w1: C76.1@118.839,184.551 U10.4@118.839,186.309 ; C76.1@119.069,184.321 119.069,183.826 v2@120.122,182.773 ; v2(159.512,183.134) D1.A@161.696,183.134 ; D1.A@161.798,183.236 C54.2@164.372,183.236 ; C54.2@164.465,183.143 167.522,183.143 170.815,186.436 170.815,187.804
  Bottom Layer w0.254: v2@126.552,139.252 v2(126.746,139.446)
  Bottom Layer w0.5: v2(120.523,182.626) 120.523,172.974 117.856,170.307 117.856,142.367 120.971,139.252 v2@126.552,139.252
  Bottom Layer w1: v2(120.523,182.626) 127.381,182.626 131.318,186.563 146.177,186.563 149.606,183.134 v2(159.512,183.134)
pads on no net: J1.P1 J1.P2 J6. J6.A8 J6.B8 S1.2 S1.4 S2.2 S2.4 U2.15 U2.25 U3.4 U4.11 U4.12 U4.13 U4.14 U4.15 U5.3 U5.7 U9.1 U9.5 U9.8 U10.1 U10.5 U10.8 U12.2 U12.3 U12.4 U12.14 U12.17 U12.18 U12.19 U12.21 U12.26 U12.27 U12.28 U12.29 U12.38 U12.39 U12.40 U12.41 U12.42 U12.43 U12.45 U12.46 X1.12 X1.15 X1.16 X1.24 X1.25 X1.26 X1.27 X1.28 X1.29 X1.30 X1.36 X1.37

## Polygon pours and split planes (outlines as drawn)
GND on Top Layer "GND_L01_P009" (solid, pour order 9): 98.872,181.635 98.872,180.746 115.128,180.746 115.128,173.888 114.366,173.126 114.366,172.11 115.001,171.475 117.287,171.475 117.287,122.199 120.97,118.516 207.33,118.516 207.33,197.891 205.679,199.542 98.237,199.542 98.618,199.923 99.761,199.923
ISO_GND on Top Layer "ISO_GND_L01_P002" (solid, pour order 2): 97.756,176.301 97.756,118.262 98.518,119.024 116.171,119.024 112.615,122.58 112.869,122.834 112.869,171.475 113.25,171.475 113.758,171.983 113.758,173.38 113.377,173.761 113.377,174.777 112.615,175.539 112.615,176.047 98.772,176.047 98.518,176.301 97.883,176.301
GND on Bottom Layer "GND_L02_P005" (solid, pour order 5): 98.806,181.61 98.806,180.721 115.062,180.721 115.062,173.863 114.3,173.101 114.3,172.085 114.935,171.45 117.221,171.45 117.221,122.174 120.904,118.491 207.264,118.491 207.264,197.866 205.613,199.517 98.171,199.517 98.552,199.898 99.695,199.898
ISO_GND on Bottom Layer "ISO_GND_L02_P000" (solid, pour order 0): 97.79,176.276 97.79,118.237 98.552,118.999 116.205,118.999 112.649,122.555 112.903,122.809 112.903,171.45 113.284,171.45 113.792,171.958 113.792,173.355 113.411,173.736 113.411,174.752 112.649,175.514 112.649,176.022 98.806,176.022 98.552,176.276 97.917,176.276

## Keep-outs
Top Layer:
  rectangle: 166.294,123.749 186.588,131.394
Bottom Layer:
  rectangle: 166.294,123.749 186.588,131.394

## Silkscreen, mask and mechanical layers (free items; w line width, h text height)
Top Overlay:
  circle w0.254: c177.927,175.514 r1.034
  circle w0.254: c198.349,182.905 r1.102
  circle w0.254: c184.328,193.726 r0.988
  circle w0.254: c189.027,145.313 r0.966
  circle w0.254: c190.906,134.544 r0.467
  circle w0.254: c112.344,186.36 r0.829
  circle w0.254: c112.37,188.798 r0.818
  circle w0.254: c198.882,141.605 r1.057
  circle w0.254: c157.574,148.599 r0.48
  circle w0.254: c159.327,153.273 r0.465
  circle w0.254: c150.749,147.777 r0.774
  circle w0.254: c130.556,183.134 r0.863
  circle w0.254: c153.162,167.742 r0.845
  circle w0.254: c146.482,168.681 r0.818
  circle w0.254: c143.383,152.781 r0.467
  circle w0.254: c140.335,153.416 r0.475
  circle w0.254: c107.823,143.231 r0.846
  circle w0.254: c106.89,147.32 r0.786
  circle w0.254: c138.331,169.519 r0.435
  circle w0.254: c136.121,169.291 r0.47
  circle w0.254: c134.267,169.265 r0.435
  circle w0.254: c133.251,169.342 r0.442
  circle w0.254: c129.134,172.364 r0.829
  circle w0.254: c130.683,174.752 r0.829
  circle w0.254: c125.832,160.909 r0.768
  circle w0.254: c127.889,165.76 r0.774
  circle w0.254: c123.952,163.957 r0.488
  circle w0.254: c126.111,164.084 r0.493
  circle w0.254: c120.523,182.626 r1.025
  text "J9_2(TP)" at 112.728,189.831 h1 r90
  text "5V(TP)" at 127.511,188.941 h1 r90
  text "+ 5V(TP)" at 129.112,184.398 h2
  text "J9_1(TP)" at 112.652,181.754 h1 r90
  text "- 5V(TP)" at 118.724,180.131 h2
  text "GND(TP)" at 198.58,178.06 h1 r90
  text "+ 5V(TP)" at 178.084,176.397 h2
  text "GND(TP)" at 129.67,173.768 h1 r90
  text "3.3V_ADC(TP)" at 146.764,169.571 h1 r90
  text "5V(TP)" at 129.39,168.773 h1 r90
  text "ADC_49(TP)" at 128.12,166.672 h1 r90
  text "STEM3.3V(TP)" at 154.866,162.639 h1 r90
  text "RESET" at 167.379,161.297 h0.6 r270
  text "ADC_50(TP)" at 127.434,155.648 h1 r90
  text "STEM_A0(TP)" at 139.753,148.387 h1 r90
  text "STEM_A1(TP)" at 142.497,148.387 h1 r90
  text "GND(TP)" at 150.32,143.618 h1 r90
  text "GND(TP)" at 187.607,143.059 h1 r90
  text "BOOT" at 150.615,142.487 h0.6
  text "3.3V(TP)" at 199.164,136.854 h1 r90
  text "3v3" at 148.583,135.629 h0.6
  text "ELECTRO SQUAD" at 117.224,133.678 h3.5
  text "SWDIO" at 147.193,132.969 h0.6
  text "SWCLK" at 147.186,130.422 h0.6
  text "GND" at 145.93,127.882 h0.6 r90
  text "GND" at 148.202,127.882 h0.6
  text "TX" at 138.945,127.755 h0.6 r90
  text "RX" at 141.485,127.755 h0.6 r90
  text "3v3" at 143.644,127.755 h0.6 r90
  text "USART" at 131.699,124.968 h1
  text "SW" at 151.13,124.968 h1
Bottom Overlay:
  circle w0.254: c177.927,175.514 r0.981
  circle w0.254: c198.349,182.905 r1.099
  circle w0.254: c184.328,193.726 r0.952
  circle w0.254: c189.027,145.313 r0.988
  circle w0.254: c190.906,134.544 r0.467
  circle w0.254: c112.344,186.36 r0.875
  circle w0.254: c112.37,188.798 r0.887
  circle w0.254: c198.882,141.605 r1.096
  circle w0.254: c159.327,153.273 r0.499
  circle w0.254: c157.574,148.599 r0.464
  circle w0.254: c150.749,147.777 r0.762
  circle w0.254: c130.556,183.134 r0.839
  circle w0.254: c153.162,167.742 r0.864
  circle w0.254: c146.482,168.681 r0.827
  circle w0.254: c143.383,152.781 r0.5
  circle w0.254: c140.335,153.416 r0.501
  circle w0.254: c120.523,182.626 r0.945
  circle w0.254: c123.952,163.957 r0.521
  circle w0.254: c125.832,160.909 r0.833
  circle w0.254: c126.111,164.084 r0.545
  circle w0.254: c127.889,165.76 r0.782
  circle w0.254: c129.134,172.364 r0.807
  circle w0.254: c130.683,174.752 r0.774
  circle w0.254: c133.251,169.342 r0.488
  circle w0.254: c134.267,169.265 r0.441
  circle w0.254: c136.121,169.291 r0.442
  circle w0.254: c138.331,169.519 r0.502
  circle w0.254: c138.331,169.519 r0.464
  circle w0.254: c107.823,143.231 r0.839
  circle w0.254: c106.89,147.32 r0.828
  text "VCC(TP)" at 184.737,192.574 h1 r90
  text "ADC_57(TP)" at 126.342,169.573 h1 r90
  text "ADC_58(TP)" at 124.209,169.497 h1 r90
  text "C36_2(TP)" at 138.636,168.848 h1 r90
  text "C34_2(TP)" at 133.454,168.671 h1 r90
  text "C35_2(TP)" at 134.673,168.62 h1 r90
  text "C37_2(TP)" at 136.477,168.569 h1 r90
  text "C27_2(TP)" at 159.642,152.694 h1 r90
  text "R37_1(TP)" at 111.718,148.813 h2
  text "C25_2(TP)" at 157.914,148.02 h1 r90
  text "R32_2(TP)" at 113.065,141.142 h2
  text "C4_1(TP)" at 191.239,133.98 h1 r90